# EAGLE board maclight-v2 (EAGLE 7.1.0)
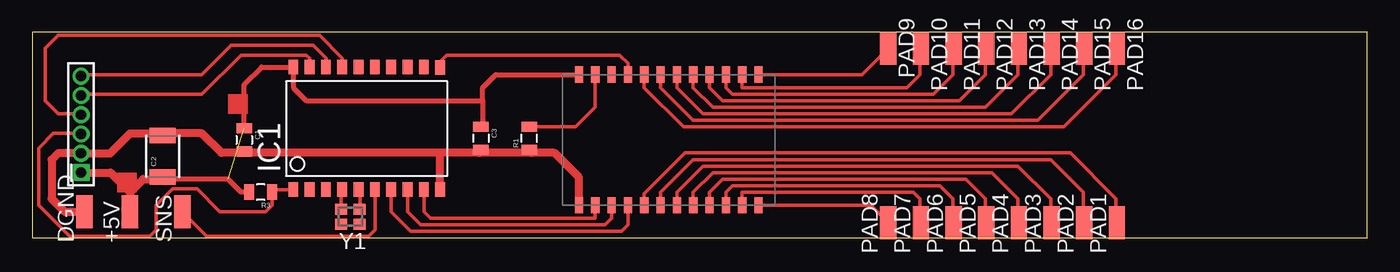
[diagram p0: board, top side]

Size 103.89 x 16 mm. Coordinates in mm from the lower left corner, seen from the top.
Outline: 0,0 103.89,0 103.89,16 0,16 0,0
Copper layers (1*16): Top 0.035mm / dielectric 1.5mm / Bottom 0.035mm
Design rules "default *": minimum track width 12mil, minimum drill 24mil, track to track 10mil, track to pad 10mil, pad to pad 10mil, via to via 10mil, smd to smd 10mil, copper to edge 40mil, drill to drill 8mil, minimum pad ring 10mil, minimum via ring 8mil, stop-mask expansion 4mil, vias tented up to drill 0mil, thermal gap 10mil

## Footprints (pad centres in the part's own frame; a part is rotated, then mirrored left to right if it is on the bottom)
SMD1,27-2,54 = smd 1.27 x 2.54: 1 0,0
0805 = smd 0.8 x 1.2: 1 -0.9,0; 2 0.9,0
1210 = smd 1.2 x 2: 1 -1.6,0; 2 1.6,0
SO20L = smd 0.762 x 1.143: 1 -5.08,-5.131; 2 -3.81,-5.131; 3 -2.54,-5.131; 4 -1.27,-5.131; 5 0,-5.131; 6 1.27,-5.131; 7 2.54,-5.131; 8 3.81,-5.131; 9 5.08,-5.131; 10 6.35,-5.131; 11 6.35,4.369; 12 5.08,4.394; 13 3.81,4.394; 14 2.54,4.394; 15 1.27,4.394; 16 0,4.394; 17 -1.27,4.394; 18 -2.54,4.394; 19 -3.81,4.394; 20 -5.08,4.394
SO-24 = smd 1.27 x 0.635: 1 -5.08,7.62; 2 -5.08,6.35; 3 -5.08,5.08; 4 -5.08,3.81; 5 -5.08,2.54; 6 -5.08,1.27; 7 -5.08,0; 8 -5.08,-1.27; 9 -5.08,-2.54; 10 -5.08,-3.81; 11 -5.08,-5.08; 12 -5.08,-6.35; 13 5.08,-6.35; 14 5.08,-5.08; 15 5.08,-3.81; 16 5.08,-2.54; 17 5.08,-1.27; 18 5.08,0; 19 5.08,1.27; 20 5.08,2.54; 21 5.08,3.81; 22 5.08,5.08; 23 5.08,6.35; 24 5.08,7.62
AVR_MINI_PROG = drill 0.8 pad 1.27 square: 1 0,0 | drill 0.8 pad 1.27: 2 1.5,0; 3 3,0; 4 4.5,0; 5 6,0; 6 7.5,0.01
FA-128 = smd 0.95 x 0.85: 1 -0.725,-0.575; 2 0.725,-0.575; 3 0.725,0.575; 4 -0.725,0.575

## Placement (x,y rotation side)
+5V  [SMD1,27-2,54]  7.62,2.03 0 top
C1  0.1uF  [0805]  16.51,7.62 270 top
C2  10uF  [1210]  10.16,6.35 90 top
C3  0.1uF  [0805]  34.92,7.75 270 top
DGND  [SMD1,27-2,54]  4.06,2.03 0 top
IC1  AT90S2313S  [SO20L]  25.4,8.89 0 top
PAD1  [SMD1,27-2,54]  84.39,1.18 0 top
PAD2  [SMD1,27-2,54]  81.85,1.18 0 top
PAD3  [SMD1,27-2,54]  79.31,1.18 0 top
PAD4  [SMD1,27-2,54]  76.77,1.18 0 top
PAD5  [SMD1,27-2,54]  74.23,1.18 0 top
PAD6  [SMD1,27-2,54]  71.69,1.18 0 top
PAD7  [SMD1,27-2,54]  69.15,1.18 0 top
PAD8  [SMD1,27-2,54]  66.61,1.18 0 top
PAD9  [SMD1,27-2,54]  66.61,14.73 180 top
PAD10  [SMD1,27-2,54]  69.15,14.73 180 top
PAD11  [SMD1,27-2,54]  71.69,14.73 180 top
PAD12  [SMD1,27-2,54]  74.23,14.73 180 top
PAD13  [SMD1,27-2,54]  76.77,14.73 180 top
PAD14  [SMD1,27-2,54]  79.31,14.73 180 top
PAD15  [SMD1,27-2,54]  81.85,14.73 180 top
PAD16  [SMD1,27-2,54]  84.39,14.73 180 top
R1  [0805]  38.67,7.75 90 top
R3  1k  [0805]  17.78,3.56 180 top
SNS  [SMD1,27-2,54]  11.68,2.03 0 top
U2  STP16CP05SO-24  [SO-24]  50.16,7.62 90 top
U$1  AVR_MINI_PROGSMD  [AVR_MINI_PROG]  3.81,5.08 90 top
Y1  [FA-128]  24.77,1.65 180 top

## Library data of the parts
+5V DGND PAD1-PAD16 SNS = wirepad
C1-C3 R1 R3 = SparkFun
IC1 = atmel; OC_FARNELL: unknown; OC_NEWARK: unknown
U2 = Synapseware
U$1 = SparkFun-Connectors
Y1 = crystal

## Nets
5V: +5V.1 C1.1 C2.1 C3.1 IC1.20 R3.2 U2.24 U$1.1
/OE: IC1.11 U2.21
CLK: IC1.8 U2.3
DATA: IC1.9 U2.2
GND: C1.2 C2.2 C3.2 DGND.1 IC1.10 R1.1 U2.1 U$1.2
LE: IC1.7 U2.4
MISO: IC1.18 U$1.6
MOSI/SDA: IC1.17 U$1.4
N$1: R1.2 U2.23
N$4: PAD1.1 U2.5
N$5: PAD2.1 U2.6
N$6: PAD3.1 U2.7
N$7: PAD4.1 U2.8
N$8: PAD6.1 U2.10
N$10: IC1.5 Y1.1
N$11: PAD7.1 U2.11
N$12: IC1.4 Y1.2
N$13: PAD8.1 U2.12
N$14: PAD9.1 U2.13
N$15: PAD10.1 U2.14
N$16: PAD11.1 U2.15
N$17: PAD12.1 U2.16
N$18: PAD13.1 U2.17
N$19: PAD14.1 U2.18
N$20: PAD15.1 U2.19
N$21: PAD16.1 U2.20
N$37: PAD5.1 U2.9
PWR_SENSE: IC1.6 SNS.1
RESET: IC1.1 R3.1 U$1.3
RXD: IC1.2
SCK/SCL: IC1.19 U$1.5
TXD: IC1.3

## Tracks (layer width: path | path; a pad name or v marks a point on that pad's centre or on a via)
5V  (1 unrouted)
  Top 0.406: C1.1 16.51,11.94 17.86,13.28 IC1.20 20.32,11.68 21.34,10.67 35.05,10.67 | R3.2 16.26,3.56 15.24,4.57 10.34,4.57 | 35.05,10.67 35.05,11.68 36.07,12.7 U2.24 | 35.05,10.67 35.05,8.77 C3.1
  Top 0.61: U$1.1 6.1,5.08 7.62,3.56 | 7.62,3.56 +5V.1 | 7.62,3.56 8.64,4.57 9.98,4.57 C2.1 10.34,4.57
/OE
  Top 0.254: U2.21 46.35,13.59 45.72,14.22 32.26,14.22 31.75,13.72 31.62,13.51 IC1.11
CLK
  Top 0.254: IC1.8 29.21,2.03 30.23,1.02 44.58,1.02 45.09,1.52 U2.3
DATA
  Top 0.254: IC1.9 30.48,2.03 30.99,1.52 43.81,1.52 U2.2
GND
  Top 0.254: 35.05,6.73 C3.2 | 3.79,6.6 U$1.2 | 16.31,6.6 C1.2 16.39,6.6 16.31,6.6
  Top 0.61: U2.1 42.55,4.7 40.64,6.6 38.86,6.6 | 38.86,6.6 34.8,6.6 | 34.8,6.6 31.75,6.6 | 31.75,6.6 16.63,6.6 C1.2 | IC1.10 31.75,6.6 | C3.2 34.8,6.85 34.8,6.6 | R1.1 38.86,6.85 38.86,6.6 | 16.31,6.6 14.73,6.6 13.21,8.13 10.34,8.13 C2.2 9.98,8.13 7.62,8.13 6.07,6.58 U$1.2 2.01,6.58 1.52,6.1 1.52,3.05 2.54,2.03 DGND.1
LE
  Top 0.254: IC1.7 27.94,2.03 29.46,0.51 45.85,0.51 46.35,1.02 U2.4
MISO
  Top 0.254: IC1.18 22.86,13.97 21.84,14.99 15.49,14.99 13.21,12.7 3.92,12.7 U$1.6
MOSI/SDA
  Top 0.254: IC1.17 24.13,13.97 22.35,15.75 2.03,15.75 1.02,14.73 1.02,10.67 2.03,9.65 3.74,9.65 U$1.4
N$1
  Top 0.254: R1.2 42.29,8.64 43.81,10.16 U2.23
N$4
  Top 0.254: U2.5 47.62,3.43 50.8,6.6 80.77,6.6 84.33,3.05 84.33,1.24 PAD1.1
N$5
  Top 0.254: U2.6 48.9,3.56 51.44,6.1 79.25,6.1 81.79,3.56 81.79,1.24 PAD2.1
N$6
  Top 0.254: U2.7 50.16,3.56 52.2,5.59 76.71,5.59 79.25,3.05 79.25,1.24 PAD3.1
N$7
  Top 0.254: U2.8 51.44,3.56 52.96,5.08 74.68,5.08 76.71,3.05 76.71,1.24 PAD4.1
N$8
  Top 0.254: U2.10 53.98,3.56 54.48,4.06 70.61,4.06 71.63,3.05 71.63,1.24 PAD6.1
N$10
  Top 0.254: 25.53,3.63 25.53,2.26 Y1.1
  Top 0.406: 25.53,3.63 IC1.5
N$11
  Top 0.254: U2.11 55.24,3.56 68.58,3.56 69.09,3.05 69.09,1.24 PAD7.1
N$12
  Top 0.254: Y1.2 24.04,3.67 IC1.4
N$13
  Top 0.254: U2.12 65.25,2.54 PAD8.1
N$14
  Top 0.254: U2.13 64.58,12.7 PAD9.1
N$15
  Top 0.254: U2.14 55.24,11.68 68.07,11.68 69.09,12.7 69.09,14.67 PAD10.1
N$16
  Top 0.254: U2.15 53.98,11.68 54.48,11.18 70.1,11.18 71.63,12.7 71.63,14.67 PAD11.1
N$17
  Top 0.254: U2.16 52.7,11.68 53.72,10.67 72.14,10.67 74.17,12.7 74.17,14.67 PAD12.1
N$18
  Top 0.254: U2.17 51.44,11.68 52.96,10.16 74.17,10.16 76.71,12.7 76.71,14.67 PAD13.1
N$19
  Top 0.254: U2.18 50.16,11.68 52.2,9.65 76.2,9.65 79.25,12.7 79.25,14.67 PAD14.1
N$20
  Top 0.254: U2.19 48.9,11.68 51.44,9.14 78.23,9.14 81.79,12.7 81.79,14.67 PAD15.1
N$21
  Top 0.254: U2.20 47.62,11.68 50.67,8.64 80.26,8.64 84.33,12.7 84.33,14.67 PAD16.1
N$37
  Top 0.254: U2.9 52.7,3.56 53.72,4.57 72.64,4.57 74.17,3.05 74.17,1.24 PAD5.1
PWR_SENSE
  Top 0.254: SNS.1 13.59,0.13 26.16,0.13 26.67,0.64 IC1.6
RESET
  Top 0.254: IC1.1 18.88,3.76 R3.1 18.68,2.55 18.16,2.03 14.61,2.03 12.83,3.81 10.92,3.81 9.65,2.54 9.65,0.64 9.14,0.13 2.92,0.13 0.51,2.54 0.51,6.99 1.65,8.13 3.76,8.13 U$1.3
SCK/SCL
  Top 0.254: IC1.19 21.59,13.97 21.34,14.22 16.26,14.22 13.21,11.18 3.91,11.18 U$1.5
(copper drawn outside any net)
  shapes: Top area x2